# Altium PCB WSBR_Board.PcbDoc
Units mil, origin at the board's own origin, x right, y up, seen from the top; angles counter-clockwise.
Board outline 6000 x 4000 mil, 2 copper layers (Top Layer, Bottom Layer); 107 components, 68 nets, 309 pads, 57 vias.
Unrouted connection lines stored in the file: 221.
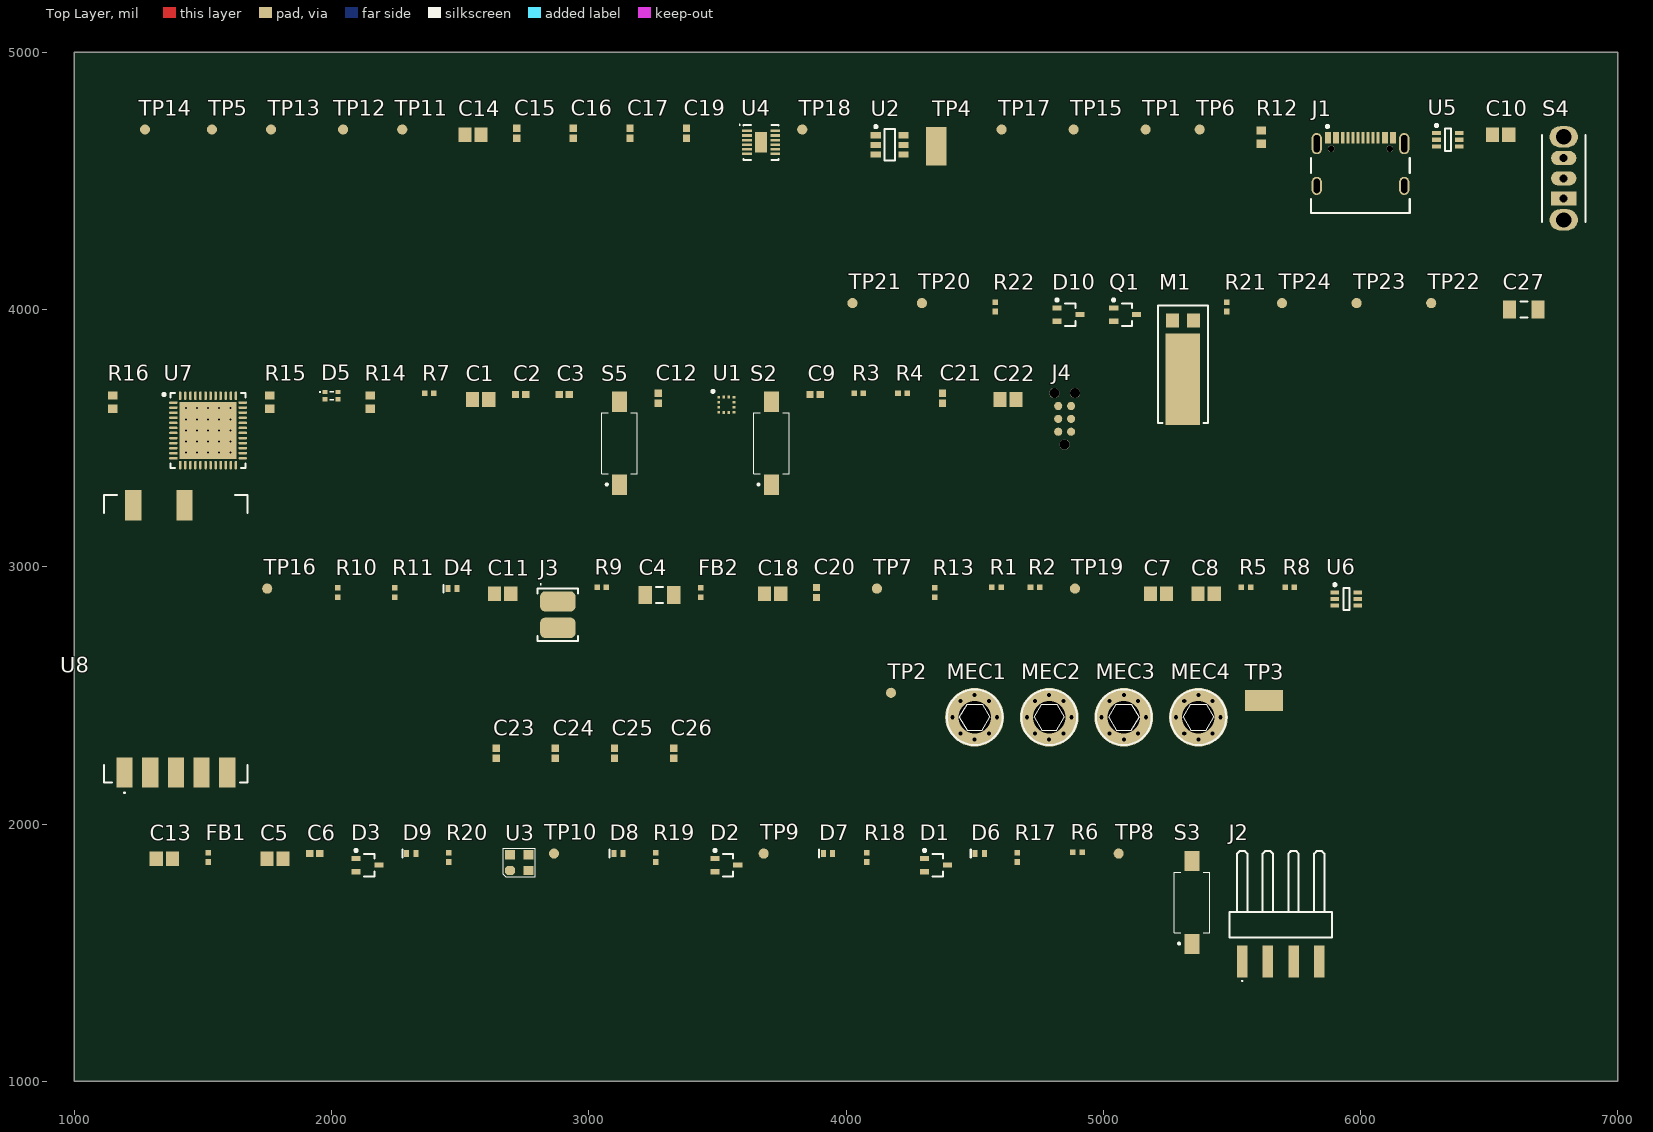
[diagram p0: Top Layer view]
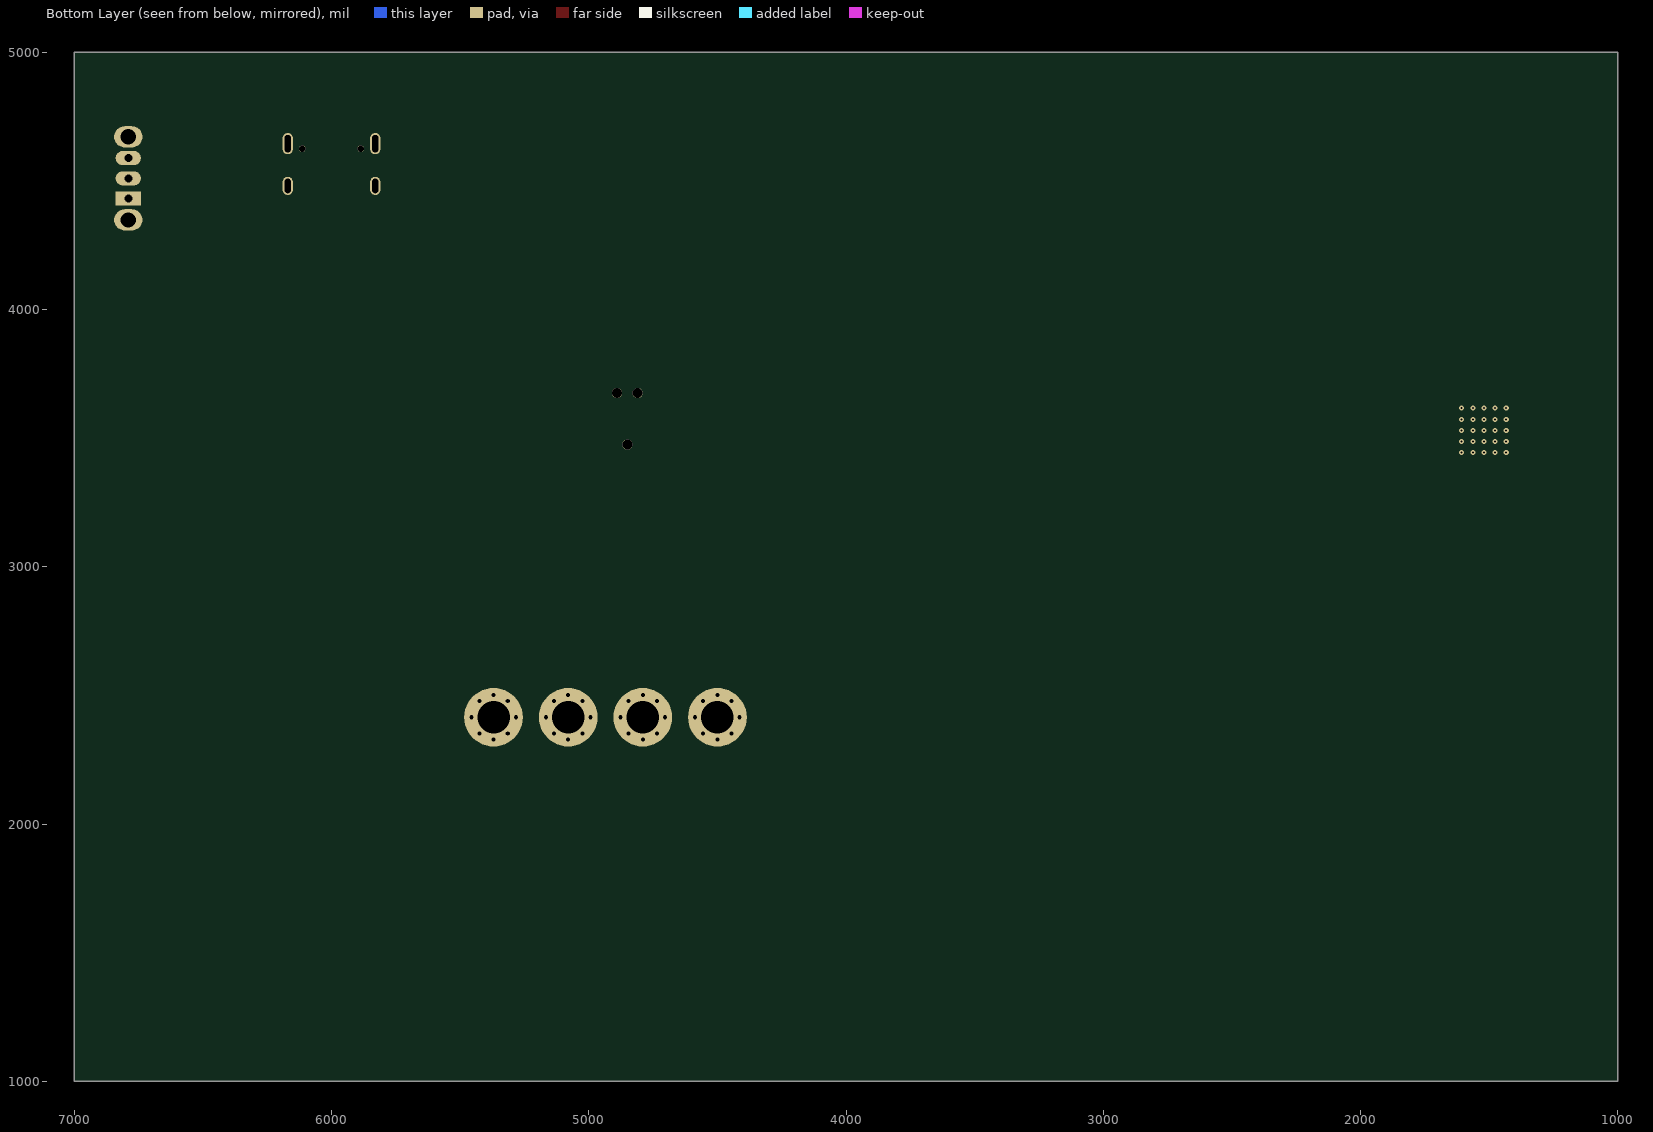
[diagram p1: Bottom Layer view, seen from below]

## Layer stack, top to bottom
Top Solder: solder mask 0.4, Solder Resist, Dk 3.5
Top Layer: signal copper 1.4
Dielectric 1: dielectric 12.6, FR-4, Dk 4.8
Bottom Layer: signal copper 1.4
Bottom Solder: solder mask 0.4, Solder Resist, Dk 3.5

## Board outline
1000,1000 7000,1000 7000,5000 1000,5000

## Design rules (kind name [scope] priority, off if disabled: settings)
Clearance [All] p1: gap=10 ignorepadtopadclearanceinfootprint=FALSE
PolygonConnect [All] p1: connectstyle=Relief reliefconductorwidth=10 reliefentries=4 polygonreliefangle="90 Angle" airgapwidth=10
RoutingVias [All] p1: holewidth=28 width=50 viastyle="Through Hole" minholewidth=28 minwidth=50 maxholewidth=28 maxwidth=50
SolderMaskExpansion [All] p1: expansion=4 istentingtop=FALSE
Width [All] p1: maxlimit=10 minlimit=10 preferedwidth=10
30 further rules are at their usual default settings.

## Components (designator, comment, footprint, x,y, rotation, side; value= is the part's Value field where it differs from the comment)
C1 "C0805" SMD_CAPC2012X12N 2580,3650 r0 top value=4u7
C2 "C0402" SMD_CAPC1005X06N 2735,3670 r0 top value=100n
C3 "C0402" SMD_CAPC1005X06N 2905,3670 r0 top value=100n
C4 "C1206" SMD_CAPC3216X16N 3275,2890 r0 top value=1n
C5 "C0805" SMD_CAPC2012X12N 1780,1865 r0 top value=1u
C6 "C0402" SMD_CAPC1005X06N 1935,1885 r0 top value=100n
C7 "C0805" SMD_CAPC2012X12N 5215,2895 r0 top value=2u2
C8 "C0805" SMD_CAPC2012X12N 5400,2895 r0 top value=2u2
C9 "C0402" SMD_CAPC1005X06N 3880,3670 r0 top value=100n
C10 "C0805" SMD_CAPC2012X12N 6545,4680 r0 top value=2u2
C11 "C0805" SMD_CAPC2012X12N 2665,2895 r0 top value=4u7
C12 "C0402" SMD_CAPC1005X06N 3270,3655 r90 top value=100n
C13 "C0805" SMD_CAPC2012X12N 1350,1865 r0 top value=4u7
C14 "C0805" SMD_CAPC2012X12N 2550,4680 r0 top value=4u7
C15 "C0402" SMD_CAPC1005X06N 2720,4685 r90 top value=100n
C16 "C0402" SMD_CAPC1005X06N 2940,4685 r90 top value=100n
C17 "C0402" SMD_CAPC1005X06N 3160,4685 r90 top value=100n
C18 "C0805" SMD_CAPC2012X12N 3715,2895 r0 top value=1u
C19 "C0402" SMD_CAPC1005X06N 3380,4685 r90 top value=100n
C20 "C0402" SMD_CAPC1005X06N 3885,2900 r90 top value=100n
C21 "C0402" SMD_CAPC1005X06N 4375,3655 r90 top value=100n
C22 "C0805" SMD_CAPC2012X12N 4630,3650 r0 top value=4u7
C23 "C0402" SMD_CAPC1005X06N 2640,2275 r90 top value=100n
C24 "C0402" SMD_CAPC1005X06N 2870,2275 r90 top value=100n
C25 "C0402" SMD_CAPC1005X06N 3100,2275 r90 top value=100n
C26 "C0402" SMD_CAPC1005X06N 3330,2275 r90 top value=100n
C27 "C1206" SMD_CAPC3216X16N 6635,4000 r0 top value=1n
D1 "BAS16W-7-F" "SOT323 SC70" 4350,1840 r0 top
D2 "BAS16W-7-F" "SOT323 SC70" 3535,1840 r0 top
D3 "BAS16W-7-F" "SOT323 SC70" 2140,1840 r0 top
D4 "APHHS1005LZGCK-V" SMD_LED_0402 2470,2915 r0 top value=Green
D5 "APHF1608SEEQBDZGKC" APHF1608SEEQBDZGKC 2000,3665 r0 top
D6 "APHHS1005LZGCK-V" SMD_LED_0402 4520,1885 r0 top value=Green
D7 "APHHS1005LZGCK-V" SMD_LED_0402 3930,1885 r0 top value=Green
D8 "APHHS1005LZGCK-V" SMD_LED_0402 3115,1885 r0 top value=Green
D9 "APHHS1005LZGCK-V" SMD_LED_0402 2310,1885 r0 top value=Green
D10 "BAS16W-7-F" "SOT323 SC70" 4865,3980 r0 top
FB1 "BLM15BD102SN1D" SMD_RESC1005X04N 1520,1870 r90 top value=1k@100M
FB2 "BLM15BD102SN1D" SMD_RESC1005X04N 3435,2900 r90 top value=1k@100M
J1 "USB4105-GF-A" USB4105-GF-A 5830,4645 r0 top
J2 "M20-8890445R" M20-8890445R 5690,1680 r0 top
J3 "CONN SMD-PAD 2-Poles 1.6mm SMD" "CONN SMD-PAD 2-Poles 1.6mm SMD" 2880,2865 r0 top
J4 "TC2030-CTX-NL-FP" SMD_TAG-CONNECT_TC2030-CTX-NL 4875,3525 r90 top
M1 "VZ43FC" VZ43FC1B5640007L 5310,3800 r0 top
MEC1 "Generic Screw Hole" "Screw M3 ISO 7380-1" 4500,2415 r0 top
MEC2 "Generic Screw Hole" "Screw M3 ISO 7380-1" 4790,2415 r0 top
MEC3 "Generic Screw Hole" "Screw M3 ISO 7380-1" 5080,2415 r0 top
MEC4 "Generic Screw Hole" "Screw M3 ISO 7380-1" 5370,2415 r0 top
Q1 "BSS138" "SOT323 SC70" 5085,3980 r0 top
R1 "R0402" SMD_RESC1005X04N 4585,2920 r0 top value=5k1
R2 "R0402" SMD_RESC1005X04N 4735,2920 r0 top value=5k1
R3 "R0402" SMD_RESC1005X04N 4050,3675 r0 top value=5k1
R4 "R0402" SMD_RESC1005X04N 4220,3675 r0 top value=5k1
R5 "R0402" SMD_RESC1005X04N 5555,2920 r0 top value=1k6
R6 "R0402" SMD_RESC1005X04N 4900,1890 r0 top value=10k
R7 "R0402" SMD_RESC1005X04N 2380,3675 r0 top value=10k
R8 "NCU15XH103F6SRC" SMD_RESC1005X04N 5725,2920 r0 top value="10k 3380K"
R9 "R0402" SMD_RESC1005X04N 3050,2920 r0 top value=10k
R10 "R0402" SMD_RESC1005X04N 2025,2900 r90 top value=10k
R11 "R0402" SMD_RESC1005X04N 2245,2900 r90 top value=10k
R12 "R0603" SMD_RESC1608X05N 5615,4670 r90 top value=0R
R13 "R0402" SMD_RESC1005X04N 4345,2900 r90 top value=220R
R14 "R0603" SMD_RESC1608X05N 2150,3640 r90 top value=68R
R15 "R0603" SMD_RESC1608X05N 1760,3640 r90 top value=0R
R16 "R0603" SMD_RESC1608X05N 1150,3640 r90 top value=0R
R17 "R0402" SMD_RESC1005X04N 4665,1870 r90 top value=220R
R18 "R0402" SMD_RESC1005X04N 4080,1870 r90 top value=220R
R19 "R0402" SMD_RESC1005X04N 3260,1870 r90 top value=220R
R20 "R0402" SMD_RESC1005X04N 2455,1870 r90 top value=220R
R21 "R0402" SMD_RESC1005X04N 5480,4010 r90 top value=1k6
R22 "R0402" SMD_RESC1005X04N 4580,4010 r90 top value=10k
S2 "PTS636" "PTS636 SK43 SMTR LFS" 3710,3480 r90 top
S3 "PTS636" "PTS636 SK43 SMTR LFS" 5345,1695 r90 top
S4 "OS102011MS2QN1" THT_SLIDESWITCH_86X43 6790,4510 r90 top
S5 "PTS636" "PTS636 SK43 SMTR LFS" 3120,3480 r90 top
TP1 "Test Point" SMD_PAD_1mm 5165,4700 r90 top
TP2 "Test Point" SMD_PAD_1mm 4175,2510 r90 top
TP3 "5019" KEYSTONE_5019 5625,2480 r0 top
TP4 "5019" KEYSTONE_5019 4350,4635 r90 top
TP5 "Test Point" SMD_PAD_1mm 1535,4700 r90 top
TP6 "Test Point" SMD_PAD_1mm 5375,4700 r90 top
TP7 "Test Point" SMD_PAD_1mm 4120,2915 r90 top
TP8 "Test Point" SMD_PAD_1mm 5060,1885 r90 top
TP9 "Test Point" SMD_PAD_1mm 3680,1885 r90 top
TP10 "Test Point" SMD_PAD_1mm 2865,1885 r90 top
TP11 "Test Point" SMD_PAD_1mm 2275,4700 r90 top
TP12 "Test Point" SMD_PAD_1mm 2045,4700 r90 top
TP13 "Test Point" SMD_PAD_1mm 1765,4700 r90 top
TP14 "Test Point" SMD_PAD_1mm 1275,4700 r90 top
TP15 "Test Point" SMD_PAD_1mm 4885,4700 r90 top
TP16 "Test Point" SMD_PAD_1mm 1750,2915 r90 top
TP17 "Test Point" SMD_PAD_1mm 4605,4700 r90 top
TP18 "Test Point" SMD_PAD_1mm 3830,4700 r90 top
TP19 "Test Point" SMD_PAD_1mm 4890,2915 r90 top
TP20 "Test Point" SMD_PAD_1mm 4295,4025 r90 top
TP21 "Test Point" SMD_PAD_1mm 4025,4025 r90 top
TP22 "Test Point" SMD_PAD_1mm 6275,4025 r90 top
TP23 "Test Point" SMD_PAD_1mm 5985,4025 r90 top
TP24 "Test Point" SMD_PAD_1mm 5695,4025 r90 top
U1 "LIS2HH12TR" LIS2HH12TR 3535,3630 r0 top
U2 "USBLC6-2SC6" SOT95P280X145-6N 4170,4640 r0 top
U3 "ECS-2520MV-080-CN-TR" SMD_XTAL2520 2730,1850 r0 top value=8MHz
U4 "STNS01PUR" SON45P300X80_HS-13N 3670,4650 r0 top
U5 "TPS22919DCKR" SOT65P210X110-6N 6340,4660 r0 top
U6 "TPS22919DCKR" SOT65P210X110-6N 5945,2875 r0 top
U7 "STM32F401CCU6" QFN50P700X700X60_HS-49N 1520,3530 r0 top
U8 "HC-12" HC-12 1195,2200 r0 top

## Footprints (in the part's own frame and the unit in brackets; to place one, negate y for a bottom-side part, rotate by r counter-clockwise, add the part's x,y. Pads: shape width x height; smd on the part's side, far side on the other; paste and mask are expansions set on the pad)
APHF1608SEEQBDZGKC [mm]
  rect 0.5x0.4 smd: 1(-0.65,0.35) 2(-0.65,-0.35) 3(0.65,-0.35) 4(0.65,0.35)
  silkscreen extent -1.15,-0.4 0.2,0.4, body extent -0.8,-0.4 0.8,0.4, height 0.5
"CONN SMD-PAD 2-Poles 1.6mm SMD" [mm] "CONN SMD-PAD 2-Poles 1.6mm SMD"
  rrect50% 3.5x2 smd paste-2539.97 mask+0: 1(0,0) 2(0,-2.6)
  silkscreen extent -2,-3.9 2,1.75
HC-12 [mm]
  rect 1.6x3 smd: 1(0,0) 2(2.54,0) 3(5.08,0) 4(7.62,0) 5(10.16,0) 7(0.86,26.4) 8(5.94,26.4)
  silkscreen extent -2,-2.01 12.16,27.4, body extent -1.5,-0.5 11.7,26.9, height 2.15
KEYSTONE_5019 [mm]
  rect 3.8x2.03 smd: 1(0,0)
  body extent -1.91,-1.01 1.91,1.01, height 2.29
LIS2HH12TR [mm]
  rect 0.275x0.25 smd: 1(-0.763,0.75) 2(-0.763,0.25) 3(-0.763,-0.25) 4(-0.763,-0.75) 7(0.763,-0.75) 8(0.763,-0.25) 9(0.763,0.25) 10(0.763,0.75)
  rect 0.25x0.275 smd: 5(-0.25,-0.762) 6(0.25,-0.762) 11(0.25,0.763) 12(-0.25,0.763)
  silkscreen extent -1.45,1.2 -1.2,1.45, body extent -1,-1 1,1, height 1
M20-8890445R [mm]
  rect 1.02x3.17 smd: 1(-3.81,-5.453) 2(-1.27,-5.453) 3(1.27,-5.453) 4(3.81,-5.453)
  silkscreen extent -5.08,-7.38 5.08,5.46, body extent -5.08,-6 5.08,5.49, height 2.51
"PTS636 SK43 SMTR LFS" [mm] "PTS636 SK43 SMTR LFS"
  rect 2x1.5 smd: 1(-4.1,0) 2(4.1,0)
  silkscreen extent -4.16,-1.75 3,1.75, body extent -4.35,-1.75 4.35,1.75, height 4.55
QFN50P700X700X60_HS-49N [mm] "QFN, 48-Leads, Body 7.00x7.00mm, Pitch 0.50mm, Thermal Pad 5.60x5.60mm, IPC Medium Density"
  oval 0.85x0.25 smd: 1(-3.425,2.75) 2(-3.425,2.25) 3(-3.425,1.75) 4(-3.425,1.25) 5(-3.425,0.75) 6(-3.425,0.25) 7(-3.425,-0.25) 8(-3.425,-0.75) 9(-3.425,-1.25) 10(-3.425,-1.75) 11(-3.425,-2.25) 12(-3.425,-2.75) 25(3.425,-2.75) 26(3.425,-2.25) 27(3.425,-1.75) 28(3.425,-1.25) 29(3.425,-0.75) 30(3.425,-0.25) 31(3.425,0.25) 32(3.425,0.75) 33(3.425,1.25) 34(3.425,1.75) 35(3.425,2.25) 36(3.425,2.75)
  oval 0.25x0.85 smd: 13(-2.75,-3.425) 14(-2.25,-3.425) 15(-1.75,-3.425) 16(-1.25,-3.425) 17(-0.75,-3.425) 18(-0.25,-3.425) 19(0.25,-3.425) 20(0.75,-3.425) 21(1.25,-3.425) 22(1.75,-3.425) 23(2.25,-3.425) 24(2.75,-3.425) 37(2.75,3.425) 38(2.25,3.425) 39(1.75,3.425) 40(1.25,3.425) 41(0.75,3.425) 42(0.25,3.425) 43(-0.25,3.425) 44(-0.75,3.425) 45(-1.25,3.425) 46(-1.75,3.425) 47(-2.25,3.425) 48(-2.75,3.425)
  rect 5.6x5.6 smd: 49(0,0)
  silkscreen extent -4.47,-3.7 3.7,3.7, body extent -3.55,-3.55 3.55,3.55, height 0.6
"Screw M3 ISO 7380-1" [mm] "Screw M3 ISO 7380-1"
  round 5.8 hole 3.2: 1(0,0)
  silkscreen extent -2.75,-2.75 2.75,2.75
SMD_CAPC1005X06N [mm] "Chip Capacitor, 2-Leads, Body 1.00x0.50mm, 0402, IPC Medium Density"
  rect 0.72x0.72 smd: 1(-0.5,0) 2(0.5,0)
  body extent -0.53,-0.28 0.53,0.27, height 0.55
SMD_CAPC2012X12N [mm] "Chip Capacitor, 2-Leads, Body 2.00x1.25mm, 0805, IPC Medium Density"
  rect 1.3x1.45 smd: 1(-0.8,0) 2(0.8,0)
  body extent -1.1,-0.72 1.1,0.72, height 1.25
SMD_CAPC3216X16N [mm] "Chip Capacitor, 2-Leads, Body 3.20x1.60mm, 1206, IPC Medium Density"
  rect 1.3x1.8 smd: 1(-1.4,0) 2(1.4,0)
  silkscreen extent -0.35,-0.8 0.35,0.8, body extent -1.7,-0.9 1.7,0.9, height 1.6
SMD_LED_0402 [mm]
  rect 0.5x0.7 smd: 1(-0.45,0) 2(0.45,0)
  silkscreen extent -0.89,-0.38 -0.89,0.38, body extent -0.5,-0.25 0.5,0.25, height 0.5
SMD_PAD_1mm [mm] "Connector, SMD, single pad, 1mm"
  round 1 smd paste-1.5: 1(0,0)
SMD_RESC1005X04N [mm] "Chip Resistor, 2-Leads, Body 1.00x0.50mm, 0402, IPC Medium Density"
  rect 0.55x0.55 smd: 1(-0.45,0) 2(0.45,0)
  body extent -0.53,-0.28 0.53,0.28, height 0.4
SMD_RESC1608X05N [mm] "Chip Resistor, 2-Leads, Body 1.58x0.85mm, 0603, IPC Medium Density"
  rect 0.8x0.95 smd: 1(-0.65,0) 2(0.65,0)
  body extent -0.82,-0.48 0.82,0.48, height 0.5
SMD_TAG-CONNECT_TC2030-CTX-NL [mm] "Connector Testpoints, 6-Leads, Pitch 1.27mm"
  round 1 hole 1 unplated paste-2539.97 mask+0: 0(-1.27,0.635) 0(3.81,-0.38) 0(3.81,1.65)
  round 0.8 smd paste-1 mask+0.102: 1(0,0) 2(0,1.27) 3(1.27,0) 4(1.27,1.27) 5(2.54,0) 6(2.54,1.27)
SMD_XTAL2520 [mm] "Chip XTAL, 4-Leads, Body 2.50x2.0mm"
  oct 1x0.9 smd: 1(-0.925,-0.775)
  rect 1x0.9 smd: 2(0.925,-0.775) 3(0.925,0.775) 4(-0.925,0.775)
  silkscreen extent -1.6,-1.39 1.6,1.4, body extent -1.25,-1 1.25,1, height 0.8
SON45P300X80_HS-13N [mm] "SON, 12-Leads, Body 3.00x3.00mm, Pitch 0.45mm, Thermal Pad 2.00x1.19mm, IPC Medium Density"
  rect 0.95x0.25 smd: 1(-1.395,1.125) 2(-1.395,0.675) 3(-1.395,0.225) 4(-1.395,-0.225) 5(-1.395,-0.675) 6(-1.395,-1.125) 7(1.395,-1.125) 8(1.395,-0.675) 9(1.395,-0.225) 10(1.395,0.225) 11(1.395,0.675) 12(1.395,1.125)
  rect 1.19x2 smd: 13(0,0)
  silkscreen extent -2.17,-1.73 1.72,1.77, body extent -1.58,-1.58 1.58,1.58, height 0.8
SOT65P210X110-6N [mm] "SOT23, 6-Leads, Body 2.00x2.10mm, Pitch 0.65mm, IPC Medium Density"
  rect 0.85x0.4 smd: 1(-1.125,0.65) 2(-1.125,0) 3(-1.125,-0.65) 4(1.125,-0.65) 5(1.125,0) 6(1.125,0.65)
  silkscreen extent -1.25,-1.1 0.3,1.52, body extent -2.25,-1.5 2.25,1.5, height 0.25
SOT95P280X145-6N [mm] "SOT23, 6-Leads, Body 2.93x2.80mm, Pitch 0.95mm, IPC Medium Density"
  rect 1x0.6 smd: 1(-1.375,0.95) 2(-1.375,0) 3(-1.375,-0.95) 4(1.375,-0.95) 5(1.375,0) 6(1.375,0.95)
  silkscreen extent -1.5,-1.55 0.5,1.92, body extent -1.5,-1.52 1.5,1.52, height 1.45
"SOT323 SC70" [mm] "SOT323 SC70, 3-Leads, Body 2.00x2.23mm, Pitch 0.65mm, IPC Medium Density"
  rect 0.9x0.5 smd: 1(-1.125,0.65) 2(-1.125,-0.65) 3(1.125,0)
  silkscreen extent -1.25,-1.1 0.67,1.57, body extent -1.22,-1.1 1.22,1.1, height 1.1
THT_SLIDESWITCH_86X43 [mm] "Slideswitch OS, THT, Straight, 8.6x4.3x8.7"
  rect 1.4x2.5 hole 0.8: 1(-2,0)
  oval 1.4x2.5 hole 0.8: 2(0,0) 3(2,0)
  oval 2.1x2.8 hole 1.5: NC1(-4.1,0) NC2(4.1,0)
  silkscreen extent -4.3,-2.15 4.3,2.15, body extent -4.3,-2.15 4.3,2.15, height 8.7
USB4105-GF-A [mm] "USB Type-c Connector USB2.0 16P"
  rect 0.6x1.15 smd paste+0 mask+0: A1-B12(1.12,0.575) A4-B9(1.92,0.575) B1-A12(7.52,0.575) B4-A9(6.72,0.575)
  rect 0.3x1.15 smd paste+0 mask+0: A5(3.07,0.575) A6(4.07,0.575) A7(4.57,0.575) A8(5.57,0.575) B5(6.07,0.575) B6(5.07,0.575) B7(3.57,0.575) B8(2.57,0.575)
  rrect100% 1x2.1 hole 1.7 slot 0.6 at 0 deg paste-2539.97 mask+0: SH1(0,0) SH2(8.64,0)
  rrect100% 1x1.8 hole 1.4 slot 0.6 at 0 deg paste-2539.97 mask+0: SH3(0,-4.18) SH4(8.64,-4.18)
  round 0.65 hole 0.65 unplated paste-2539.97 mask+0: ""(1.43,-0.5) ""(7.21,-0.5)
  silkscreen extent -0.55,-6.85 9.18,1.82, body extent -0.64,-6.95 9.28,1.25, height 0.25
VZ43FC1B5640007L [mil]
  rect 51x55 smd paste+0 mask+0: 1(-41.34,157.26) 2(41.34,157.26)
  rect 134x354 smd paste-177 mask-177: 3(0,-71.09)
  silkscreen extent -98,-241 98,215, body extent -87,-234 90,204, height 170

## Part data
C1 C11 C13 C14 C22: library part CMP-02451-1, "CERCAP 4u7 25V 10% X7R 0805", Manufacturer=YAGEO, Manufacturer Part Number=CC0805KKX7R8BB475, Supplier2 Part Number=603-CC805KKX7R8BB475, Supplier Part Number=311-1885-1-ND, Supplier=Digi-Key, Supplier2=Mouser
C2 C3 C6 C9 C12 C15 C16 C17 C19 C20 C21 C23 C24 C25 C26: library part CMP-02708-2, "CERCAP 100n 50V 10% X7R 0402", Manufacturer=YAGEO, Manufacturer Part Number=CC0402KRX7R9BB104, Supplier2 Part Number=603-CC402KRX7R9BB104, Supplier Part Number=311-3566-1-ND, Note=50V, Supplier=Digi-Key, Supplier2=Mouser
C4 C27: library part CMP-02123-1, "CERCAP 1n 2kV 10% X7R 1206", Manufacturer="Würth Elektronik", Manufacturer Part Number=885342208024, Supplier2 Part Number=710-885342208024, Supplier Part Number=732-885342208024CT-ND, Note=2kV, Supplier=Digi-Key, Supplier2=Mouser
C5 C18: library part CMP-02451-1, "CERCAP 1u 25V 10% X7R 0805", Manufacturer=YAGEO, Manufacturer Part Number=CC0805KKX7R8BB105, Supplier2 Part Number=603-CC805KKX7R8BB105, Supplier Part Number=311-1456-1-ND, Supplier=Digi-Key, Supplier2=Mouser
C7 C8 C10: library part CMP-02451-1, "CERCAP 2u2 25V 10% X7R 0805", Manufacturer=YAGEO, Manufacturer Part Number=CC0805KKX7R8BB225, Supplier2 Part Number=603-CC805KKX7R8BB225, Supplier Part Number=311-1884-1-ND, Supplier=Digi-Key, Supplier2=Mouser
D1 D2 D3 D10: library part CMP-03049-1, "DIODE 200mW 75V 300mA SOT-323", Manufacturer="Diodes Incorporated", Supplier2 Part Number=621-BAS16W-F, Supplier Part Number=BAS16W-FDICT-ND, Manufacturer Part Number=BAS16W-7-F, Supplier=Digi-Key, Supplier2=Mouser
D4 D6 D7 D8 D9: library part CMP-01377-1, "LED GREEN 2mA 2.65V 0402", Manufacturer=Kingbright, Supplier2 Part Number=604-APHHS1005LZGCK-V, Supplier Part Number=754-2126-1-ND, Manufacturer Part Number=APHHS1005LZGCK-V, Supplier=DigiKey, Supplier2=Mouser
D5: library part CMP-02821-1, "LED RGB 20mA 3.3V 1.6x0.8mm", Manufacturer=Kingbright, Supplier2 Part Number=604-APHF1608QBDZGKC, Supplier Part Number=754-2144-1-ND, Manufacturer Part Number=APHF1608SEEQBDZGKC, Supplier=Digi-Key, Supplier2=Mouser
FB1 FB2: library part CMP-03004-1, "FERRITE 200mA-1k 0402", Manufacturer="Murata Electronics", Supplier2 Part Number=81-BLM15BD102SN1D, Supplier Part Number=490-1010-1-ND, Manufacturer Part Number=BLM15BD102SN1D, Note=1.5kR@100MHz, Supplier=Digi-Key, Supplier2=Mouser
J1: library part CMP-02911-1, "CONN Female USB-C 16x Horizontal SMD", Manufacturer=GCT, Supplier2 Part Number=640-USB4105-GF-A, Supplier Part Number=2073-USB4105-GF-ACT-ND, Manufacturer Part Number=USB4105-GF-A, Supplier=Digi-Key, Supplier2=Mouser
J2: library part CMP-02820-1, "CONN Male 4-Poles 2.54mm Horizontal SMD", Manufacturer="Harwin Inc.", Supplier2 Part Number=855-M20-8890445, Supplier Part Number=952-M20-8890445RCT-ND, Manufacturer Part Number=M20-8890445R, Supplier=Digi-Key, Supplier2=Mouser
J3: library part CMP-02986-2
J4: library part CMPL-001-0427-A.2, "TP TAG-CONNECT 7.6x9mm"
M1: library part CMP-03063-2, "EMECH VIBRATION MOTOR 3V", Manufacturer="Vybronics Inc", Manufacturer Part Number=VZ43FC1B5640007L, Supplier Part Number=1670-VZ43FC1B5640007LCT-ND, Supplier=Digi-Key
MEC1 MEC2 MEC3 MEC4: library part CMPL-001-0477-A.7, "EMECH Generic Screw Hole - different sizes"
Q1: library part CMP-01592-2, "MOSFET N 0.2A 50V SOT323", Manufacturer="Diodes Incorporated", Manufacturer2="Micro Commercial Co", Manufacturer2 Part Number=BSS138W-TP, Manufacturer Part Number=BSS138W-7-F, Supplier2 Part Number=BSS138W-TPMSCT-ND, Supplier Part Number=BSS138W-FDICT-ND, Supplier=Digi-Key, Supplier2=Digi-Key
R1 R2 R3 R4: library part CMP-02880-1, "RES 5k1 62.5mW 1% 0402", Manufacturer=YAGEO, Manufacturer Part Number=RC0402FR-075K1L, Supplier2 Part Number=603-RC0402FR-075K1L, Supplier Part Number=311-5.10KLRCT-ND, Supplier=Digi-Key, Supplier2=Mouser
R5 R21: library part CMP-02880-1, "RES 1k6 62.5mW 1% 0402", Manufacturer=YAGEO, Manufacturer Part Number=RC0402FR-071K6L, Supplier2 Part Number=603-RC0402FR-071K6L, Supplier Part Number=YAG3045CT-ND, Supplier=Digi-Key, Supplier2=Mouser
R6 R7 R9 R10 R11 R22: library part CMP-02880-1, "RES 10k 62.5mW 1% 0402", Manufacturer=YAGEO, Manufacturer Part Number=RC0402FR-0710KL, Supplier2 Part Number=603-RC0402FR-0710KL, Supplier Part Number=311-10.0KLRCT-ND, Supplier=Digi-Key, Supplier2=Mouser
R8: library part CMP-02981-1, "RES NTC 10k 3380K", Manufacturer="Murata Electronics", Supplier2 Part Number=81-NCU15XH103F6SRC, Supplier Part Number=490-NCU15XH103F6SRCCT-ND, Manufacturer Part Number=NCU15XH103F6SRC, Supplier=Digi-Key, Supplier2=Mouser
R12 R15 R16: library part CMPL-001-0142-A.2, "RES 0R 0603", Manufacturer=YAEGO, Manufacturer Part Number=RC0603FR-070RL, Supplier2 Part Number=603-RC0603FR-070RL, Supplier Part Number=311-0.0HRCT-ND, Supplier=Digi-Key, Supplier2=Mouser
R13 R17 R18 R19 R20: library part CMP-02880-1, "RES 220R 62.5mW 1% 0402", Manufacturer=YAGEO, Manufacturer Part Number=RC0402FR-07220RL, Supplier2 Part Number=603-RC0402FR-07220RL, Supplier Part Number=311-220LRCT-ND, Supplier=Digi-Key, Supplier2=Mouser
R14: library part CMPL-001-0142-A.2, "RES 68R 0603", Manufacturer=YAEGO, Manufacturer Part Number=RC0603FR-0768RL, Supplier2 Part Number=603-RC0603FR-0768RL, Supplier Part Number=311-68.0HRCT-ND, Supplier=Digi-Key, Supplier2=Mouser
S2 S3 S5: library part CMP-03040-1, "BUTTON SPST 12V 50mA 6x3.5x4.3mm", Manufacturer=C&K, Manufacturer Part Number="PTS636 SK43 SMTR LFS", Supplier2 Part Number=611-PTS636SK43SMTRLF, Supplier Part Number=CKN12311-1-ND, Supplier=Digi-Key, Supplier2=Mouser
S4: library part CMPL-001-0005-3, "SWITCH SPDT 12V 0.1A 4.3x8.6mm", Manufacturer=C&K, Supplier Part Number=CKN9565-ND, Manufacturer Part Number=OS102011MS2QN1, Supplier=Digi-Key
TP1 TP2 TP5 TP6 TP7 TP8 TP9 TP10 TP11 TP12 TP13 TP14 TP15 TP16 TP17 TP18 TP19 TP20 TP21 TP22 TP23 TP24: library part CMP-02902-2, "TP TESTPOINT MULTIPLE_SIZE"
TP3 TP4: library part CMPL-001-0505-9, "TP SMD 3.81x 2.03mm", Manufacturer="Keystone Electronics", Supplier Part Number=36-5019CT-ND, Design Item ID=5019, Manufacturer Part Number=5019, Source=5019.SchLib, Supplier=Digi-Key
U1: library part CMP-03024-1, "SENSOR accelerometer 1.7-3.6V LGA-12", Manufacturer=STMicroelectronics, Supplier2 Part Number=511-LIS2HH12TR, Supplier Part Number=497-15069-1-ND, Manufacturer Part Number=LIS2HH12TR, Supplier=Digi-Key, Supplier2=Mouser
U2: library part CMP-02913-1, "IC Dual ESD Protection SOT23-6", Manufacturer=STMicroelectronics, Supplier2 Part Number=511-USBLC6-2SC6, Supplier Part Number=497-5235-1-ND, Manufacturer Part Number=USBLC6-2SC6, Note=ESD, Supplier=Digi-Key, Supplier2=Mouser
U3: library part CMP-02862-3, "OSC 8MHz Enable/Disable 1.6V-3.6V 4-SMD 2.5x2mm", Manufacturer="ECS Inc.", Supplier Part Number=XC3029CT-ND, Manufacturer Part Number=ECS-2520MV-080-CN-TR, Supplier=Digi-Key
U4: library part CMPL-001-0518-A.2, "Charger Single LiIon 5.4V 12-DFN", Manufacturer=STMicroelectronics, Supplier2 Part Number=511-STNS01PUR, Supplier Part Number=497-13880-1-ND, Manufacturer Part Number=STNS01PUR, Supplier=Digi-Key, Supplier2=Mouser
U5 U6: library part CMPL-001-0510-A.1, "POWER-DISTRIBUTION Single Switch 5.5V SOT363", Manufacturer="Texas Instruments", Supplier2 Part Number=595-TPS22919DCKR, Supplier Part Number=296-TPS22919DCKRCT-ND, Manufacturer Part Number=TPS22919DCKR, Supplier=Digi-Key, Supplier2=Mouser
U7: library part CMP-03026-1, "MCU ARM-Cortex-M4 256kB_FLASH 64kB_RAM 1.7-3.6V UFQFPN48", Manufacturer=STMicroelectronics, Supplier2 Part Number=511-STM32F401CCU6, Supplier Part Number=497-17426-ND, Manufacturer Part Number=STM32F401CCU6, PartId=1, Supplier=Digi-Key, Supplier2=Mouser
U8: library part CMP-03065-1, "RF Module UART", Manufacturer="HC Tech", Manufacturer Part Number=HC-12, Supplier=AliExpress, Supplier Part Number=HC-12

## Via types
v1: diameter 31.5, hole 15.75, Top Layer to Bottom Layer, 32 vias
v2: diameter 19.68, hole 7.87, Top Layer to Bottom Layer, 25 vias

## Nets (pads, with @x,y where several pads share a name; then routed paths per layer and width w, separated by ;. In a path a pad name is that pad's centre, name@x,y a point inside that pad or via, vN(x,y) a via of type N, cw(c..) or ccw(c..) an arc to the next point about the centre after c; other vN are vias at no path point)
+3V1: C1.2 C2.2 C3.2 C9.2 C14.2 C15.2 C16.2 C17.2 C19.2 C21.2 C22.2 D5.1 D10.3 FB1.1 FB2.1 J4.1 M1.2 R3.2 R4.2 R12.1 R13.2 S2.2 TP17.1 TP18.1 U1.2 U1.9 U1.10 U7.1 U7.24 U7.36 U7.48 U8.1
+3V1A: C18.2 C20.2 FB2.2 TP19.1 U7.9
+3V1M: R12.2 S4.1 TP15.1 U5.6
+3V1O: C5.2 C6.2 FB1.2 TP2.1 U3.1 U3.4
+3V1R: C10.1 C26.1 S3.1 S4.2 TP6.1 U4.3 U5.1
A_1: D6.2 R17.1
A_2: D7.2 R18.1
A_3: D8.2 R19.1
A_4: D9.2 R20.1
A_CHG: D4.2 R13.1
ACC_IRQ1: U1.12 U7.41
ACC_IRQ2: U1.11 U7.40
ACC_SCL: R3.1 U1.1 U7.42
ACC_SDA: R4.1 U1.4 U7.43
B\M\S\_\C\H\G\: D4.1 TP14.1 U4.5 U7.16
BAT: C11.2 J3.1 TP7.1 U4.11 U4.12
BATMS: U4.10 U6.1
BATMS_SW: R11.2 U6.6
BMS_BATMS: C27.1 R10.2 R11.1 TP16.1 U7.10
BMS_CEN: TP13.1 U4.6 U7.15
BMS_SD: TP12.1 U4.4 U7.11
BOOT: C9.1 R7.1 S2.1 U7.44
BT_G: C23.2 J2.3 U7.20
BT_R: C25.2 J2.1 U7.25
BT_Y: C24.2 J2.2 U7.21
CAP: C13.2 U7.22
CC1: J1.A5 R2.2
CC2: J1.B5 R1.2
D_N: J1.A7 J1.B7 U2.4
D_P: J1.A6 J1.B6 U2.6
GND: C1.1 C2.1 C3.1 C4.1 C5.1 C6.1 C7.1 C8.1 C10.2 C11.1 C12.1 C13.1 C14.1 C15.1 C16.1 C17.1 C18.1 C19.1 C20.1 C21.1 C22.1 C23.1 C24.1 C25.1 C27.2 D6.1 D7.1 D8.1 D9.1 J1.A1-B12 J1.B1-A12 J2.4 J3.2 J4.5 MEC1.1 MEC2.1 MEC3.1 MEC4.1 Q1.2 R1.1 R2.1 R5.2 R7.2 R8.2 R9.1 R10.1 R22.1 S5.1 TP4.1 U1.3 U1.5 U1.6 U1.7 U1.8 U2.2 U3.2 U4.7 U4.13 U5.2 U6.2 U7.8 U7.23 U7.35 U7.47 U7.49 U8.2 U8.7 U8.8
  other v1: 4500,2328.39 4790,2328.39 5080,2328.39 5370,2328.39 4444.88,2352.01 4555.12,2352.01 4734.88,2352.01 4845.12,2352.01 5024.88,2352.01 5135.12,2352.01 5314.88,2352.01 5425.12,2352.01 4413.39,2415 4586.61,2415 4703.39,2415 4876.61,2415 4993.39,2415 5166.61,2415 5283.39,2415 5456.61,2415 4444.88,2477.99 4555.12,2477.99 4734.88,2477.99 4845.12,2477.99 5024.88,2477.99 5135.12,2477.99 5314.88,2477.99 5425.12,2477.99 4500,2501.61 4790,2501.61 5080,2501.61 5370,2501.61
  other v2: 1433.39,3443.39 1476.69,3443.39 1520,3443.39 1563.31,3443.39 1606.61,3443.39 1433.39,3486.69 1476.69,3486.69 1520,3486.69 1563.31,3486.69 1606.61,3486.69 1433.39,3530 1476.69,3530 1520,3530 1563.31,3530 1606.61,3530 1433.39,3573.31 1476.69,3573.31 1520,3573.31 1563.31,3573.31 1606.61,3573.31 1433.39,3616.61 1476.69,3616.61 1520,3616.61 1563.31,3616.61 1606.61,3616.61
HC_RX: TP23.1 U7.13 U8.4
HC_SET: TP24.1 U7.14 U8.5
HC_TX: TP22.1 U7.12 U8.3
ISET: R5.1 U4.9
K_B: D5.3 R16.2
K_G: D5.4 R15.2
K_R: D5.2 R14.2
LED_B: R16.1 U7.28
LED_G: R15.1 U7.27
LED_R: R14.1 U7.26
M+: D10.1 M1.1 Q1.3
MG: Q1.1 R21.2
NTC: R8.1 U4.8
OSC: U3.3 U7.5
PA7: TP9.1 U7.17
PA8: TP8.1 U7.29
PB0: TP20.1 U7.18
PB1: TP21.1 U7.19
PC15: TP10.1 U7.4
PWR_EN: D3.1 U7.31
PWR_LED1: R17.2 U7.45
PWR_LED2: R18.2 U7.46
PWR_LED3: R19.2 U7.2
PWR_LED4: R20.2 U7.3
PWR_ON: D1.3 D2.3 D3.3 R9.2 TP11.1 U5.3 U6.3
PWR_SW: R6.2 U7.30
R\S\T\: C12.2 J4.3 S5.2 U7.7
SHIELD: C4.2 J1.SH1 J1.SH2 J1.SH3 J1.SH4
SW_CLK: J4.4 U7.37
SW_DIO: J4.2 U7.34
SW_O: J4.6 U7.39
SW_PWR: C26.2 D1.1 R6.1 S3.2
SYS: C8.2 TP5.1 U4.2
USB_N: U2.3 U7.32
USB_P: U2.1 U7.33
VBUS: C7.2 D2.1 J1.A4-B9 J1.B4-A9 TP1.1 TP3.1 U2.5 U4.1
VIB: R21.1 R22.2 U7.38
pads on no net: D1.2 D2.2 D3.2 D10.2 J1. J1.A8 J1.B8 J4.0 M1.3 S4.3 S4.NC1 S4.NC2 U5.4 U5.5 U6.4 U6.5 U7.6